# Altium PCB MainBoard.PcbDoc
Units mm, origin at the board's own origin, x right, y up, seen from the top; angles counter-clockwise.
Board outline 66 x 21 mm, 4 copper layers (Top Layer, Layer 1, Layer 2, Bottom Layer), stack 0.603 mm thick; 4 components, 50 nets, 188 pads, 77 vias.
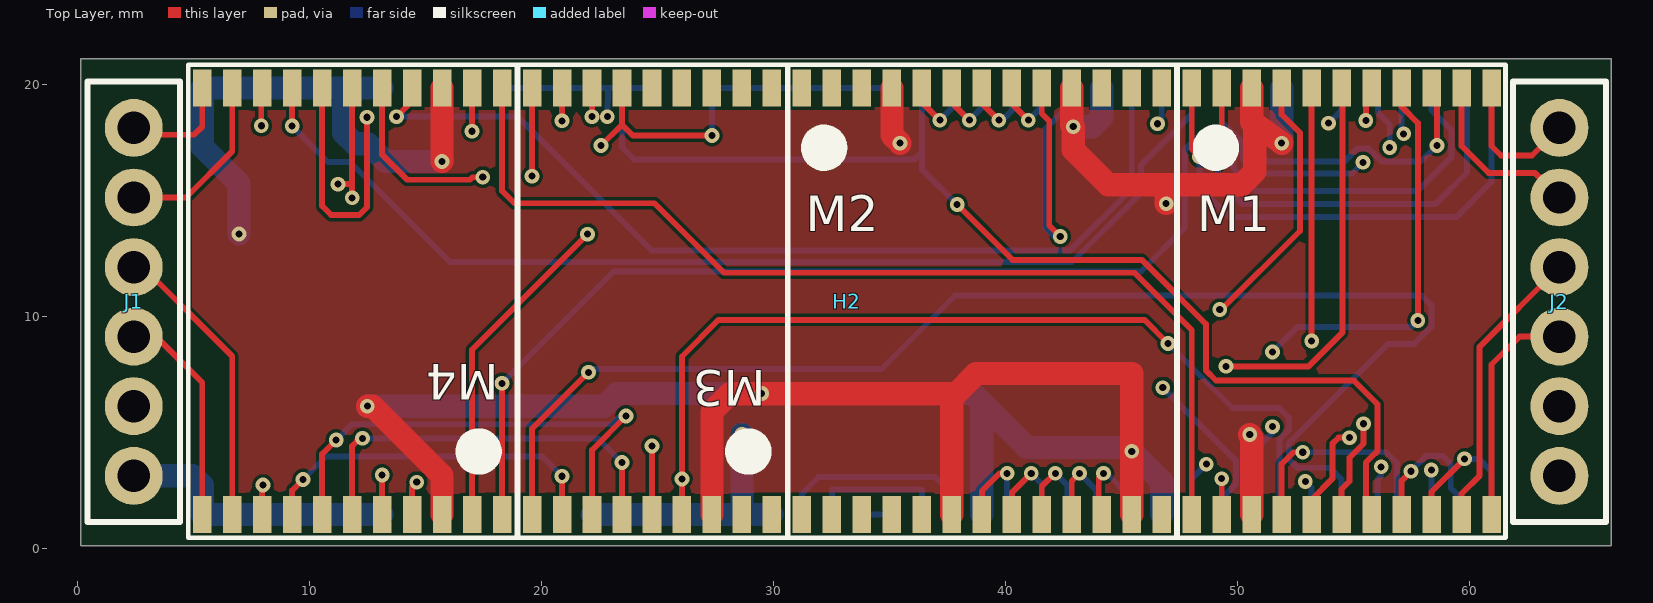
[diagram p0: Top Layer view]
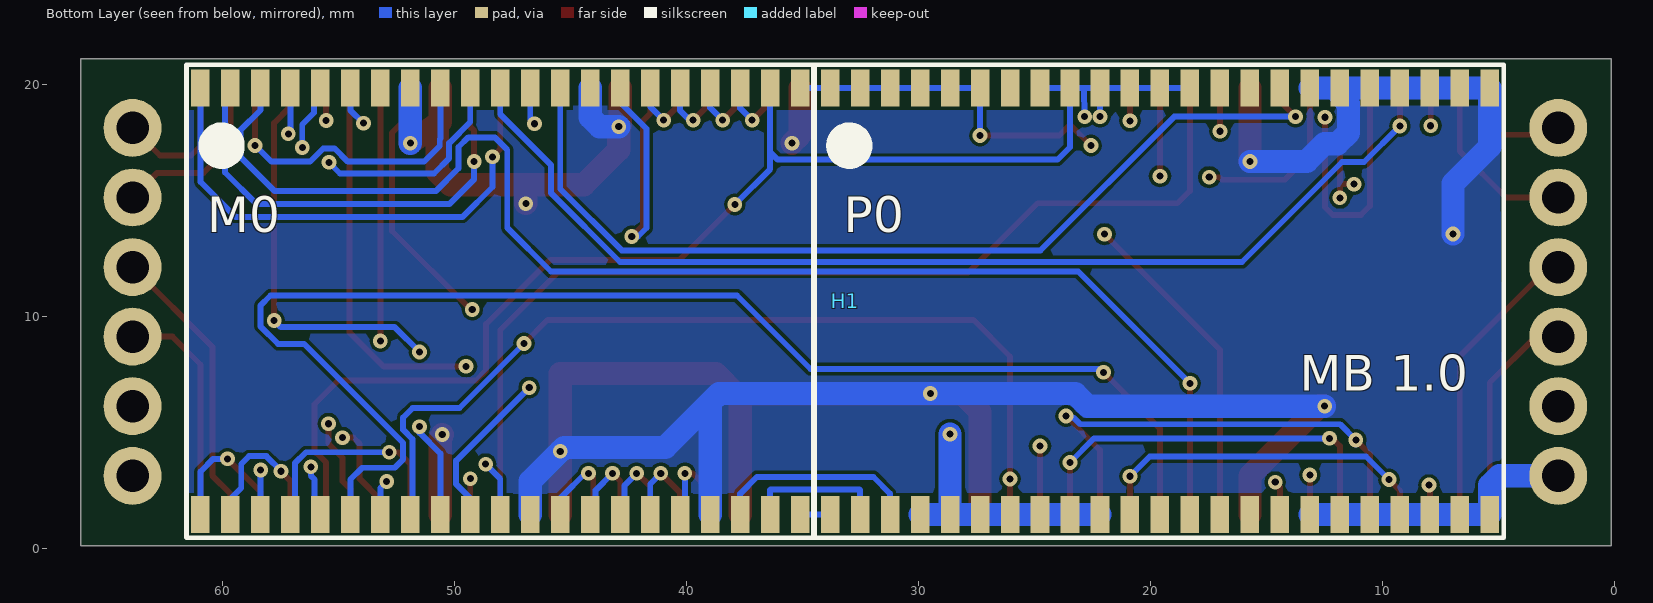
[diagram p1: Bottom Layer view, seen from below]
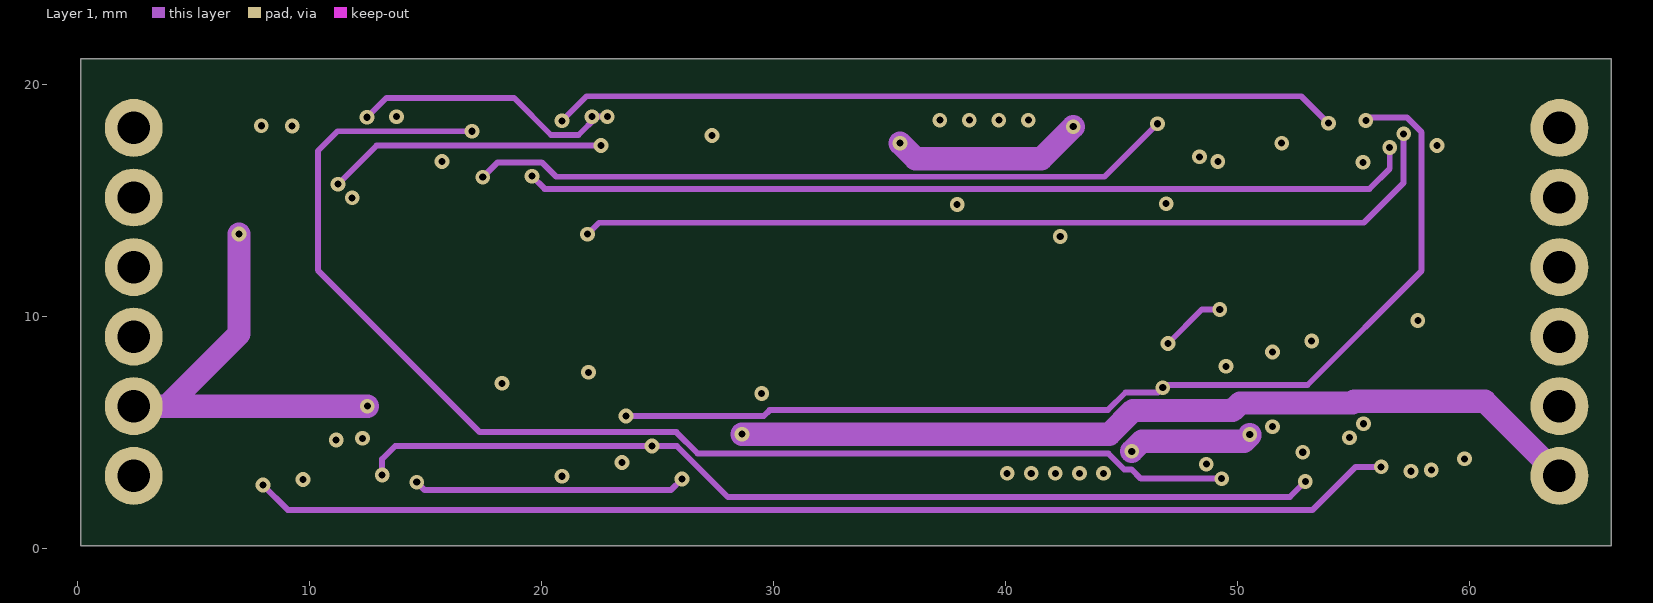
[diagram p2: Layer 1]
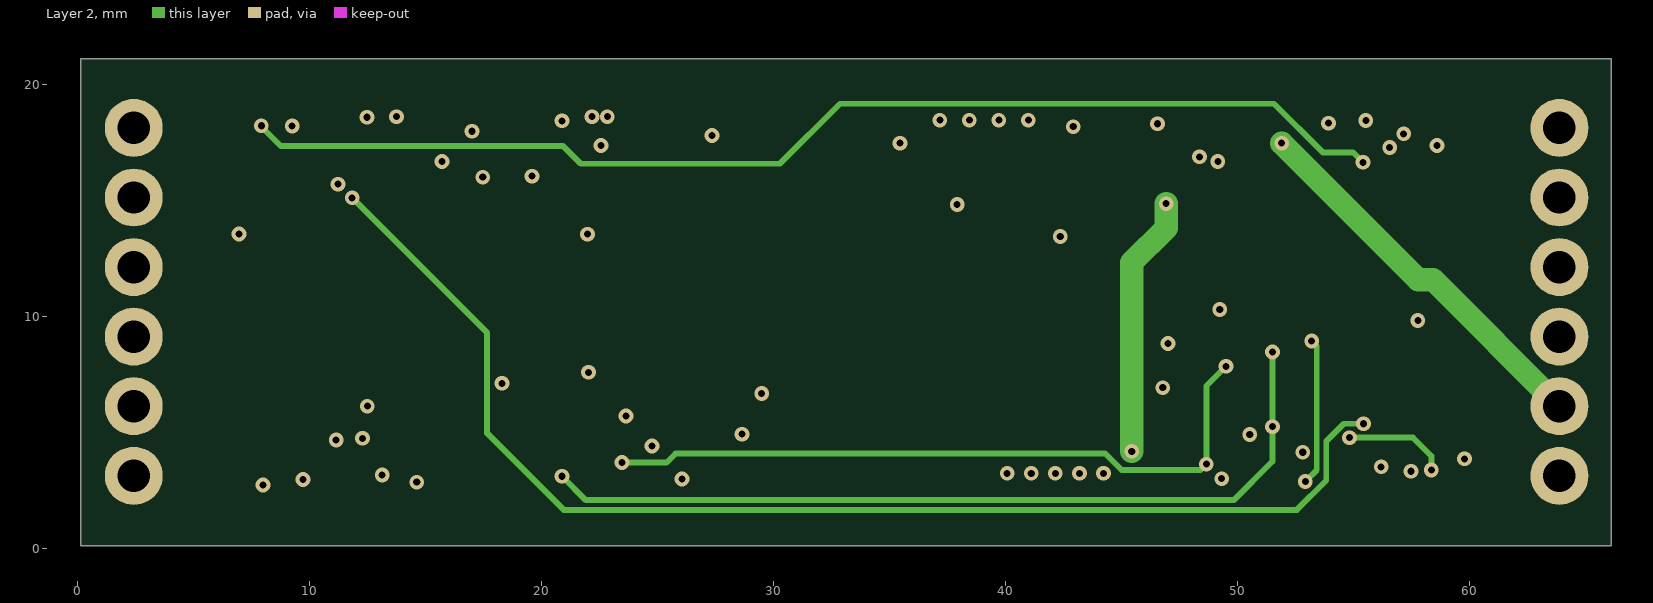
[diagram p3: Layer 2]

## Layer stack, top to bottom
Top Solder: solder mask 0.0102, Solder Resist, Dk 3.5
Top Layer: signal copper 0.0356
Dielectric 2: prepreg 0.0711, PP-006, Dk 4.1
Layer 1: signal copper 0.035
Dielectric 1: dielectric 0.32, FR-4, Dk 4.8
Layer 2: signal copper 0.035
Dielectric 3: prepreg 0.0711, PP-006, Dk 4.1
Bottom Layer: signal copper 0.0356
Bottom Solder: solder mask 0.0102, Solder Resist, Dk 3.5

## Board outline
0.124,0.129 66.124,0.129 66.124,21.129 0.124,21.129

## Design rules (kind name [scope] priority, off if disabled: settings)
AssemblyTestPointUsage SilkToBoardRegionClearance_1 [All] p2:
AssemblyTestPointUsage SilkToBoardRegionClearance [All] p3:
Clearance [All] p1: gap=0.152 ignorepadtopadclearanceinfootprint=FALSE except(0: Arc-Hole Track-Hole SMDPad-Hole THPad-Hole Via-Hole Fill-Hole Poly-Hole Region-Hole Text-Hole)
ComponentClearance [All] p1: gap=0.1 collisioncheckmode=3 verticalgap=0.254 showdistances=FALSE
HoleSize [All] p1: absolutevalues=TRUE maxlimit=6.35 minlimit=0.3 maxpercent=80.000 minpercent=20.000
MatchedLengths DiffPair_DIFF100MatchedLengths [InDifferentialPairClass('DIFF100')] p1: tolerance=0.152 checknetsindiffpair=TRUE checkdiffpairvsdiffpair=FALSE checkxsignals=FALSE checkothers=FALSE usedelayunits=FALSE
MinimumSolderMaskSliver [All] p1: minsoldermaskwidth=0.1
MinimumSolderMaskSliver SilkscreenOverComponentPads_2 [All] p2: minsoldermaskwidth=0.254
MinimumSolderMaskSliver SilkToSolderMaskClearance_1 [IsPad] p3: minsoldermaskwidth=0.254
MinimumSolderMaskSliver SilkscreenOverComponentPads_1 [All] p4: minsoldermaskwidth=0.254
MinimumSolderMaskSliver SilkToSolderMaskClearance [IsPad] p5: minsoldermaskwidth=0.254
MinimumSolderMaskSliver SilkscreenOverComponentPads [All] p6: minsoldermaskwidth=0.254
PolygonConnect [All] p1: connectstyle=Direct reliefconductorwidth=0.254 reliefentries=4 polygonreliefangle="90 Angle" airgapwidth=0.254
RoomDefinition MainBoard [InComponentClass('MainBoard')] p1: confinementstyle=ConfineIn formatcopy=TRUE lockcomponents=FALSE outline 0,0 66.25,0 66.25,21.23 0,21.23
RoutingVias [All] p1: holewidth=0.305 width=0.635 viastyle="Through Hole" minholewidth=0.305 minwidth=0.635 maxholewidth=0.711 maxwidth=1.27
SilkToBoardRegionClearance SilkToBoardRegionClearance_2 [All] p1:
SilkToSolderMaskClearance SilkToSolderMaskClearance_2 [IsPad] p1: minsilkscreentomaskgap=0.254 clearancetoexposedcopper=TRUE
SolderMaskExpansion [All] p1: expansion=0.102
Width [All] p1: maxlimit=2.54 minlimit=0.152 preferedwidth=0.254
25 further rules are at their usual default settings.

## Components (designator, comment, footprint, x,y, rotation, side; value= is the part's Value field where it differs from the comment)
H1 "MB 88 pin" "MB 88 pins" 61.362,0.67 r180 bottom
H2 "MB 88 pin" "MB 88 pins" 61.362,20.67 r180 top
J1 "Cyclops_connector" CYCLOPS-1LINE 85.41,-4.855 r90 top
J2 "Cyclops_connector" CYCLOPS-1LINE 146.89,-4.855 r90 top

## Footprints (in the part's own frame and the unit in brackets; to place one, negate y for a bottom-side part, rotate by r counter-clockwise, add the part's x,y. Pads: shape width x height; smd on the part's side, far side on the other; paste and mask are expansions set on the pad)
CYCLOPS-1LINE [mm]
  round 2.5 hole 1.4: 1(8,83) 2(11,83) 3(14,83) 4(17,83) 5(20,83) 6(23,83)
  silkscreen extent 6,81 25,85
"MB 88 pins" [mm]
  rect 0.8x1.6 smd: 1(56,19.2) 2(54.707,19.2) 3(53.414,19.2) 4(52.121,19.2) 5(50.828,19.2) 6(49.535,19.2) 7(48.242,19.2) 8(46.949,19.2) 9(45.656,19.2) 10(44.363,19.2) 11(43.07,19.2) 12(41.777,19.2) 13(40.484,19.2) 14(39.191,19.2) 15(37.898,19.2) 16(36.605,19.2) 17(35.312,19.2) 18(34.019,19.2) 19(32.726,19.2) 20(31.433,19.2) 21(30.14,19.2) 22(28.847,19.2) 23(27.553,19.2) 24(26.26,19.2) 25(24.967,19.2) 26(23.674,19.2) 27(22.381,19.2) 28(21.088,19.2) 29(19.795,19.2) 30(18.502,19.2) 31(17.209,19.2) 32(15.916,19.2) 33(14.623,19.2) 34(13.33,19.2) 35(12.037,19.2) 36(10.744,19.2) 37(9.451,19.2) 38(8.158,19.2) 39(6.865,19.2) 40(5.572,19.2) 41(4.279,19.2) 42(2.986,19.2) 43(1.693,19.2) 44(0.4,19.2) 45(0.4,0.8) 46(1.693,0.8) 47(2.986,0.8) 48(4.279,0.8) 49(5.572,0.8) 50(6.865,0.8) 51(8.158,0.8) 52(9.451,0.8) 53(10.744,0.8) 54(12.037,0.8) 55(13.33,0.8) 56(14.623,0.8) 57(15.916,0.8) 58(17.209,0.8) 59(18.502,0.8) 60(19.795,0.8) 61(21.088,0.8) 62(22.381,0.8) 63(23.674,0.8) 64(24.967,0.8) 65(26.26,0.8) 66(27.553,0.8) 67(28.847,0.8) 68(30.14,0.8) 69(31.433,0.8) 70(32.726,0.8) 71(34.019,0.8) 72(35.312,0.8) 73(36.605,0.8) 74(37.898,0.8) 75(39.191,0.8) 76(40.484,0.8) 77(41.777,0.8) 78(43.07,0.8) 79(44.363,0.8) 80(45.656,0.8) 81(46.949,0.8) 82(48.242,0.8) 83(49.535,0.8) 84(50.828,0.8) 85(52.121,0.8) 86(53.414,0.8) 87(54.707,0.8) 88(56,0.8)
  silkscreen extent -0.2,-0.2 56.6,20.2

## Via types
v1: diameter 0.635, hole 0.305, Top Layer to Bottom Layer, tented both sides, 77 vias

## Nets (pads, with @x,y where several pads share a name; then routed paths per layer and width w, separated by ;. In a path a pad name is that pad's centre, name@x,y a point inside that pad or via, vN(x,y) a via of type N, cw(c..) or ccw(c..) an arc to the next point about the centre after c; other vN are vias at no path point)
B1: H1.51 H2.7 H2.16 H2.51 | length 65.4
  Top Layer w0.254: H2.7 v1(13.12,3.18) ; H2.16 v1(24.758,4.432) ; v1(53.204,8.959) H2.51
  Layer 1 w0.254: v1(13.12,3.18) 13.12,3.865 13.688,4.432 v1(24.758,4.432) 25.829,4.432 28.03,2.231 52.266,2.231 v1(52.931,2.895)
  Layer 2 w0.254: v1(52.931,2.895) 53.424,3.388 53.424,8.739 v1(53.204,8.959)
  Bottom Layer w0.254: v1(52.931,2.895) 53.204,2.622 H1.51
B2: H1.52 H2.8 H2.17 H2.52 | length 67.3
  Top Layer w0.254: H2.8 14.413,2.668 v1(14.615,2.87) ; H2.17 v1(26.051,3.009) 26.051,8.293 27.625,9.867 45.993,9.867 v1(47.009,8.851) ; v1(49.24,10.32) 49.319,10.32 52.702,13.703 52.702,17.932 51.911,18.723 H2.52
  Layer 1 w0.254: v1(14.615,2.87) 14.94,2.545 14.94,2.527 25.568,2.527 v1(26.051,3.009) ; v1(47.009,8.851) 48.478,10.32 v1(49.24,10.32)
  Bottom Layer w0.254: v1(47.009,8.851) 49.79,6.07 51.81,6.07 52.22,5.66 52.22,5.129 51.816,4.725 51.816,1.565 H1.52
B3: H1.53 H2.4 H2.13 H2.48 | length 73.1
  Top Layer w0.254: H2.4 9.241,2.513 v1(9.713,2.985) ; H2.13 v1(20.879,3.124) ; H2.48 57.083,19.057 57.782,18.358 v1(57.782,9.842)
  Layer 2 w0.254: v1(20.879,3.124) 21.907,2.095 49.847,2.095 51.511,3.759 v1(51.511,5.265) v1(51.511,8.481)
  Bottom Layer w0.254: v1(9.713,2.985) 10.703,3.975 20.028,3.975 v1(20.879,3.124) ; H1.53 50.618,4.102 51.511,4.995 v1(51.511,5.265) ; v1(51.511,8.481) 52.586,9.556 57.496,9.556 v1(57.782,9.842)
B4: H1.55 H2.6 H2.15 H2.50 | length 66.4
  Top Layer w0.254: H2.6 11.827,4.426 12.161,4.76 v1(12.27,4.76) ; H2.15 23.465,3.719 v1(23.467,3.721) ; v1(49.507,7.863) 53.073,7.863 54.527,9.317 54.527,19.84 H2.50
  Layer 2 w0.254: v1(23.467,3.721) 25.391,3.721 25.777,4.107 44.297,4.107 45.014,3.39 48.409,3.39 v1(48.663,3.644) 48.663,7.02 v1(49.507,7.863)
  Bottom Layer w0.254: v1(12.27,4.76) 22.427,4.76 v1(23.467,3.721) ; H1.55 48.032,3.013 v1(48.663,3.644)
B5: H1.54 H2.5 H2.14 H2.49 | length 75.9
  Top Layer w0.254: H2.5 10.534,4.084 v1(11.14,4.69) ; H2.14 22.172,4.252 v1(23.639,5.719) ; v1(55.54,18.47) 55.54,19.62 H2.49
  Layer 1 w0.254: v1(23.639,5.719) 29.579,5.719 29.835,5.975 29.83,5.98 44.414,5.98 45.173,6.739 46.576,6.739 v1(46.784,6.946) 46.901,7.064 53.023,7.064 57.948,11.989 57.948,17.956 57.304,18.6 55.67,18.6 v1(55.54,18.47)
  Bottom Layer w0.254: v1@11.14,4.487 v1(11.14,4.69) ; v1@11.14,4.83 v1(11.14,4.69) ; v1(23.639,5.719) 23.566,5.646 23.297,5.646 23.016,5.366 11.816,5.366 v1(11.14,4.69) ; v1(46.784,6.946) 49.933,3.797 49.933,2.786 49.217,2.07 49.325,2.07 H1.54
GND: H1.1 H1.2 H1.3 H1.4 H1.5 H1.6 H1.7 H1.31 H1.37 H1.56 H1.62 H2.9 H2.18 H2.26 H2.32 H2.36 H2.53 H2.59 H2.65 H2.80 J1.2 J2.2 | length 196.9
  Top Layer w1: v1(12.485,6.145) 12.712,6.145 15.707,3.15 H2.9 ; v1(15.707,16.7) H2.80 ; H2.18 27.344,5.905 28.119,6.68 37.869,6.68 ; H2.65 35.102,17.841 v1(35.455,17.487) ; H2.26 37.688,6.499 ; 37.688,6.59 37.688,6.499 ; H2.59 42.86,18.262 v1(42.923,18.199) 42.923,17.207 44.436,15.694 46.92,15.694 ; H2.32 v1(45.446,4.199) 45.446,7.556 38.744,7.556 37.869,6.68 ; v1(46.93,14.88) 46.93,15.684 46.92,15.694 ; v1(50.536,4.93) 50.541,4.925 50.541,4.863 50.618,4.786 H2.36 ; H2.53 50.618,18.416 ; v1(51.911,17.487) 50.618,18.416 ; 37.688,6.499 37.869,6.68 ; 46.92,15.694 50.183,15.694 50.751,16.262 50.751,18.283 50.618,18.416
  Layer 1 w1: J1.2 3.825,6.145 ; v1(6.95,13.57) 6.95,9.27 3.825,6.145 ; v1(12.485,6.145) 3.825,6.145 ; v1(35.455,17.487) 36.123,16.819 41.544,16.819 v1(42.923,18.199) ; v1(45.446,4.199) 45.882,4.635 50.289,4.635 50.536,4.882 v1(50.536,4.93)
  Layer 2 w1: v1(45.446,4.199) 45.446,12.344 46.93,13.828 v1(46.93,14.88) ; v1(51.911,17.487) 57.804,11.595 58.44,11.595 J2.2
  Bottom Layer w1: v1(6.95,13.57) 6.95,15.747 5.362,17.335 H1.1 H1.2 H1.3 H1.4 H1.5 H1.6 ; v1(12.485,6.145) 22.693,6.145 23.237,6.689 38.601,6.689 38.981,6.309 ; H1.7 H1.6 ; v1(15.707,16.7) 13.252,16.7 12.493,17.459 11.935,17.459 11.454,17.94 11.454,19.197 11.827,19.57 H1.6 ; H1.62 38.981,6.309 ; v1(42.923,18.199) 43.747,18.199 44.153,18.605 H1.31 ; H1.56 46.739,2.906 v1(45.446,4.199) 45.275,4.37 40.92,4.37 38.981,6.309 ; v1(51.911,17.487) H1.37
  other v1: 29.486,6.689
M1_D1: H1.46 H2.41 | length 6.5
  Top Layer w0.254: H2.41 57.083,2.933 v1(57.49,3.34)
  Bottom Layer w0.254: v1(57.49,3.34) 57.49,3.358 58.122,3.99 58.87,3.99 59.203,3.657 59.203,2.619 59.669,2.153 H1.46
M1_D2: H1.45 H2.42 | length 6.2
  Top Layer w0.254: H2.42 58.376,2.451 v1(59.8,3.874)
  Bottom Layer w0.254: v1(59.8,3.874) 60.409,3.874 60.962,3.321 H1.45
M1_D3: H1.48 H2.37 | length 9.9
  Top Layer w0.254: H2.37 51.911,3.651 52.42,4.16 v1(52.82,4.16)
  Bottom Layer w0.254: v1(52.82,4.16) 56.414,4.16 56.89,3.684 56.89,1.87 57.083,1.677 H1.48
M1_D4: H1.47 H2.38 | length 10.7
  Top Layer w0.254: H2.38 53.204,2.12 54.099,3.015 54.099,4.529 54.36,4.79 v1(54.84,4.79)
  Layer 2 w0.254: v1(54.84,4.79) 57.576,4.79 58.366,4 v1(58.366,3.39)
  Bottom Layer w0.254: v1(58.366,3.39) 58.376,3.38 H1.47
M1_D5: H1.43 H2.54 | length 19.5
  Top Layer w0.254: v1(49.16,16.7) 49.16,18.036 49.307,18.183 49.325,18.165 H2.54
  Bottom Layer w0.254: v1(49.16,16.7) 49.16,15.93 50.23,14.86 58.54,14.86 59.9,16.22 59.9,19.639 H1.43
M1_D6: H1.44 H2.55 | length 22.2
  Top Layer w0.254: H2.55 48.032,17.238 v1(48.37,16.9)
  Bottom Layer w0.254: v1(48.37,16.9) 48.37,15.596 49.654,14.312 59.456,14.312 60.962,15.819 H1.44
M1_D7: H1.36 H2.47 | length 14.1
  Top Layer w0.254: H2.47 58.61,19.636 v1(58.61,17.39)
  Bottom Layer w0.254: H1.36 50.618,17.681 50.643,17.657 50.643,17.367 51.32,16.69 54.606,16.69 55.173,17.257 55.667,17.257 56.234,16.69 57.9,16.69 58.6,17.39 v1(58.61,17.39)
M1_IO1: H2.44 J2.3 | length 9.9
  Top Layer w0.254: H2.44 60.962,7.942 62.165,9.145 J2.3
M1_IO2: H2.43 J2.4 | length 12.4
  Top Layer w0.254: H2.43 59.669,2.369 60.45,3.15 60.45,8.705 J2.4
M1_IO3: H2.46 J2.5 | length 7.6
  Top Layer w0.254: H2.46 59.669,17.371 60.83,16.21 62.825,16.21 J2.5
M1_IO4: H2.45 J2.6 | length 6.1
  Top Layer w0.254: H2.45 60.962,17.368 61.37,16.96 62.705,16.96 J2.6
M1M4_P1: H2.34 H2.78 | length 44.6
  Top Layer w0.254: H2.78 18.293,15.43 18.826,14.897 24.864,14.897 27.861,11.899 45.565,11.899 48.032,9.432 H2.34
M1M4_P2: H2.35 H2.79 | length 58.3
  Top Layer w0.254: v1(17,18.003) H2.79 ; H2.35 v1(49.325,3.022)
  Layer 1 w0.254: v1(17,18.003) 11.198,18.003 10.348,17.152 10.348,12.013 16.15,6.21 17.331,5.029 25.807,5.029 26.729,4.107 44.436,4.107 45.123,3.42 45.44,3.42 45.838,3.022 v1(49.325,3.022)
M2_D1: H1.61 H2.27 | length 4.3
  Top Layer w0.254: H2.27 38.981,2.491 39.74,3.25 v1(40.072,3.25) ; v1@40.049,3.45 v1@40.072,3.45
  Bottom Layer w0.254: v1(40.072,3.25) 40.072,1.672 H1.61
M2_D2: H1.60 H2.28 | length 4.1
  Top Layer w0.254: H2.28 40.274,2.412 v1(41.112,3.25)
  Bottom Layer w0.254: v1@41.11,3.25 41.567,2.793 H1.60
M2_D3: H1.59 H2.29 | length 4.2
  Top Layer w0.254: H2.29 41.567,2.687 42.141,3.261 v1@42.22,3.34
  Bottom Layer w0.254: v1(42.151,3.25) 42.68,2.721 42.68,1.65 H1.59
M2_D4: H1.58 H2.30 | length 4.2
  Top Layer w0.254: H2.30 42.86,2.919 v1(43.191,3.25)
  Bottom Layer w0.254: v1(43.191,3.25) 43.92,2.521 43.92,1.866 44.153,1.866 H1.58
M2_D5: H1.57 H2.31 | length 4.4
  Top Layer w0.254: H2.31@44.023,1.49 44.023,3.043 v1(44.23,3.25) ; v1@44.178,3.289 44.282,3.289 44.241,3.33 v1@44.23,3.33
  Bottom Layer w0.254: v1@44.23,3.33 44.292,3.33 45.446,2.175 H1.57
M2_D6: H1.26 H2.64 | length 3.3
  Top Layer w0.254: H2.64 36.395,19.253 v1(37.17,18.478)
  Bottom Layer w0.254: v1(37.17,18.478) 37.688,18.996 H1.26
M2_D7: H1.27 H2.63 | length 3.3
  Top Layer w0.254: H2.63 37.688,19.233 v1(38.442,18.478)
  Bottom Layer w0.254: v1(38.442,18.478) 38.981,19.016 H1.27
M2_D8: H1.28 H2.62 | length 3.7
  Top Layer w0.254: H2.62 38.981,19.212 v1(39.715,18.478) ; v1@39.603,18.44 v1@39.862,18.44
  Bottom Layer w0.254: v1(39.715,18.478) 39.862,18.478 40.274,18.89 H1.28
M2_D9: H1.29 H2.61 | length 3.3
  Top Layer w0.254: H2.61 40.274,19.191 v1(40.987,18.478)
  Bottom Layer w0.254: v1(40.987,18.478) 41.567,19.058 H1.29
M2_D10: H1.30 H2.60 | length 14
  Top Layer w0.254: H2.60 41.567,18.767 41.89,18.444 41.89,13.936 v1(42.364,13.461)
  Bottom Layer w0.254: v1(42.364,13.461) 42.098,13.461 41.729,13.83 41.729,18.109 42.86,19.24 H1.30
M3_D1: H1.39 H2.76 | length 37.2
  Top Layer w0.254: v1(20.879,18.453) H2.76
  Layer 1 w0.254: v1(20.879,18.453) 21.936,19.51 52.762,19.51 53.922,18.35 v1(53.93,18.35)
  Bottom Layer w0.254: v1(53.93,18.35) 53.93,18.342 54.497,18.909 H1.39
M3_D2: H1.40 H2.77 | length 45.2
  Top Layer w0.254: v1(19.586,16.065) H2.77
  Layer 1 w0.254: v1(19.586,16.065) 20.131,15.52 55.7,15.52 56.57,16.39 v1(56.57,17.3)
  Bottom Layer w0.254: H1.40 55.79,19.469 56.062,19.197 56.062,18.798 56.57,18.29 ; v1(56.57,17.3) 56.57,18.29
M3_D7: H1.50 H2.12 | length 59
  Top Layer w0.254: H2.12 19.586,5.174 v1(22.019,7.607)
  Bottom Layer w0.254: v1(22.019,7.607) 22.159,7.747 34.656,7.747 37.826,10.917 57.943,10.917 58.379,10.481 58.379,9.595 57.609,8.825 56.491,8.825 52.223,4.557 52.223,3.853 52.584,3.492 53.988,3.492 54.497,2.983 H1.50
M4_D1: H1.34 H2.85 | length 47.3
  Top Layer w0.254: v1(9.241,18.224) H2.85
  Bottom Layer w0.254: v1(9.241,18.224) 10.789,16.676 11.734,16.676 16.048,12.363 42.869,12.363 45.852,15.346 45.852,16.552 48.032,18.732 H1.34
M4_D2: H1.35 H2.86 | length 61.1
  Top Layer w0.254: v1@7.948,18.278 v1(7.91,18.24) 7.91,19.832 H2.86
  Layer 2 w0.254: v1(7.91,18.24) 7.91,18.21 8.76,17.36 20.927,17.36 21.689,16.598 30.274,16.598 32.865,19.189 51.584,19.189 53.684,17.09 54.99,17.09 v1(55.42,16.66)
  Bottom Layer w0.254: H1.35 49.325,18.4 50.236,17.488 50.236,16.834 50.89,16.18 54.94,16.18 v1(55.42,16.66)
M4_D3: H1.32 H2.81 | length 41.1
  Top Layer w0.254: v1(13.738,18.63) 14.413,19.305 H2.81
  Bottom Layer w0.254: v1(13.738,18.63) 18.971,18.63 24.737,12.865 42.796,12.865 45.446,15.515 H1.32
M4_D4: H1.33 H2.82 | length 39.9
  Top Layer w0.254: H2.82 13.12,16.99 14.197,15.913 16.913,15.913 17.02,16.02 v1(17.46,16.02)
  Layer 1 w0.254: v1(17.46,16.02) 18.102,16.662 20.001,16.662 20.623,16.04 44.27,16.04 v1(46.555,18.326)
  Bottom Layer w0.254: v1(46.555,18.326) 46.739,18.509 H1.33
M4_D5: H1.41 H2.10 | length 54.4
  Top Layer w0.254: H2.10 17,8.582 v1(21.981,13.563)
  Layer 1 w0.254: v1(21.981,13.563) 22.476,14.058 55.448,14.058 57.17,15.78 v1(57.17,17.89)
  Bottom Layer w0.254: H1.41 57.083,17.977 v1(57.17,17.89)
M4_D6: H1.42 H2.11 | length 58.4
  Top Layer w0.254: H2.11 v1(18.293,7.132)
  Bottom Layer w0.254: v1(18.293,7.132) 23.111,11.95 45.844,11.95 47.73,13.836 47.73,17.202 48.268,17.74 49.41,17.74 49.83,17.32 49.83,16.4 50.81,15.42 57.757,15.42 59.24,16.903 59.24,18.05 58.376,18.914 H1.42
M4_D7: H1.49 H2.3 | length 52.9
  Top Layer w0.254: H2.3 7.948,2.706 v1(7.985,2.743)
  Layer 1 w0.254: v1(7.985,2.743) 9.052,1.676 53.246,1.676 55.1,3.53 v1(56.2,3.53)
  Bottom Layer w0.254: H1.49 56.04,1.72 56.04,2.99 56.2,3.15 v1(56.2,3.53)
M4_IO1: H2.88 J1.6 | length 4.9
  Top Layer w0.254: J1.6 2.705,17.85 5.01,17.85 5.362,18.202 H2.88
M4_IO2: H2.87 J1.5 | length 7.8
  Top Layer w0.254: J1.5 4.665,15.145 6.655,17.135 H2.87
M4_IO3: H2.2 J1.4 | length 12.7
  Top Layer w0.254: J1.4 2.805,12.145 6.655,8.295 H2.2
M4_IO4: H2.1 J1.3 | length 9.5
  Top Layer w0.254: J1.3 3.385,9.145 5.362,7.168 H2.1
P0_D1: H1.63 H1.68 | length 8.9
  Bottom Layer w0.254: H1.68 31.223,2.373 31.94,3.09 36.97,3.09 37.688,2.372 H1.63
P0_D2: H1.64 H1.67 | length 6
  Bottom Layer w0.254: H1.67 32.516,2.527 32.541,2.552 36.369,2.552 36.395,2.527 H1.64
P0_D3: H1.65 H1.66 | length 1.3
  Bottom Layer w0.254: H1.66 H1.65
VCC0: H1.82 H1.83 H1.84 H1.85 H1.86 H1.87 H1.88 J1.1 | length 12.1
  Bottom Layer w1: J1.1 4.95,3.145 5.362,2.733 H1.88 H1.87 H1.86 H1.85 H1.84 H1.83 H1.82
VCC1: H1.69 H1.70 H1.71 H1.72 H1.73 H1.74 H1.75 J2.1 | length 48.4
  Layer 1 w1: v1(28.637,4.94) 44.476,4.94 45.496,5.959 49.792,5.959 50.117,6.284 54.963,6.284 55.038,6.36 60.675,6.36 J2.1
  Bottom Layer w1: H1.75 H1.74 H1.73 H1.72 H1.71 H1.70 ; v1(28.637,4.94) H1.70 ; H1.69 H1.70
VCC2: H1.18 H1.19 H1.20 H1.21 H1.22 H1.23 H1.24 H2.39 H2.74 H2.83 | length 92.7
  Top Layer w0.254: v1(11.22,15.72) 11.717,15.72 11.827,15.83 ; v1(11.827,15.131) 11.827,15.83 ; H2.83 11.827,15.83 ; v1(22.563,17.386) 23.465,18.287 ; H2.74 23.465,18.287 ; v1(27.344,17.818) 23.935,17.818 23.465,18.287 ; H2.39 54.497,2.572 54.834,2.909 54.834,3.924 55.44,4.53 v1(55.44,5.39)
  Layer 1 w0.254: v1(11.22,15.72) 12.886,17.386 v1(22.563,17.386)
  Layer 2 w0.254: v1(11.827,15.131) 17.65,9.309 17.65,4.98 20.954,1.676 52.566,1.676 53.832,2.942 53.832,4.635 54.587,5.39 v1(55.44,5.39)
  Bottom Layer w0.254: v1(27.344,17.818) H1.18 H1.19 H1.20 H1.21 H1.22 H1.23 H1.24
VCC3: H1.11 H1.12 H1.13 H1.14 H1.15 H1.16 H1.25 H2.40 H2.75 H2.84 | length 82.7
  Top Layer w0.254: H2.84 10.534,14.776 10.92,14.39 12.13,14.39 12.468,14.728 v1(12.468,18.605) ; v1(22.172,18.63) H2.75 ; v1(37.919,14.845) 40.306,12.458 45.872,12.458 48.643,9.687 48.643,7.691 49.083,7.251 55.026,7.251 56.047,6.231 56.047,4.201 55.973,4.127 55.953,4.127 55.55,3.724 55.55,2.12 55.79,2.12 H2.40
  Layer 1 w0.254: v1(12.468,18.605) 13.307,19.443 18.806,19.443 20.406,17.843 21.587,17.843 22.374,18.63 v1(22.832,18.63)
  Bottom Layer w0.254: H1.11 H1.12 H1.13 H1.14 ; v1(22.172,18.63) H1.14 ; v1(22.832,18.63) 22.857,19.87 ; H1.16 H1.15 ; H1.25 36.395,17.106 ; v1(37.919,14.845) 36.395,16.37 36.395,17.106 ; H1.14 22.857,19.87 ; 22.857,19.87 H1.15 ; H1.15 23.465,17.312 24,16.776 36.065,16.776 36.395,17.106
pads on no net: H1.8 H1.9 H1.10 H1.17 H1.38 H1.76 H1.77 H1.78 H1.79 H1.80 H1.81 H2.19 H2.20 H2.21 H2.22 H2.23 H2.24 H2.25 H2.33 H2.56 H2.57 H2.58 H2.66 H2.67 H2.68 H2.69 H2.70 H2.71 H2.72 H2.73

## Polygon pours and split planes (outlines as drawn)
GND on Top Layer "GND_L01_P008" (solid, pour order 8): 4.935,19.045 61.385,19.045 61.385,2.495 61.51,2.37 4.935,2.37
GND on Bottom Layer "GND_L04_P010" (solid, pour order 10): 4.935,19.095 61.385,19.095 61.61,18.87 61.61,2.37 4.81,2.37

## Silkscreen, mask and mechanical layers (free items; w line width, h text height)
Top Overlay:
  circle w1: c49.08,17.29 r0.5
  circle w1: c32.18,17.29 r0.5
  circle w1: c17.28,4.19 r0.5
  circle w1: c28.91,4.19 r0.5
  lines w0.254: 18.96,0.62 18.96,20.77 ; 30.61,0.57 30.61,20.77 ; 47.4,0.57 47.4,20.77
  text "M2" at 31.39,13.68 h1.52
  text "M1" at 48.28,13.68 h1.52
  text "M4" at 18.16,7.96 h1.52 r180
  text "M3" at 29.656,7.706 h1.52 r180
Bottom Overlay:
  circle w1: c32.98,17.38 r0.5
  circle w1: c60.05,17.38 r0.5
  lines w0.254: 34.51,0.495 34.51,20.82
  text "P0" at 33.23,13.65 h1.52
  text "M0" at 60.66,13.65 h1.52
  text "MB 1.0" at 13.56,6.81 h1.52
Mechanical 1:
  lines w0.254: 66.124,21.07 66.124,0.129 0.124,0.129 0.124,21.129 66.124,21.129